# EAGLE board Main Board (EAGLE 7.7.0)

Size 242.55 x 100 mm. Coordinates in mm from the lower left corner, seen from the top.
Outline: 82.55,0 242.55,0 242.55,100 82.55,100 82.55,0
Copper layers (1*16): Top 0.035mm / dielectric 1.5mm / Bottom 0.035mm
Design rules "default": minimum track width 10mil, minimum drill 24mil, track to track 8mil, track to pad 8mil, pad to pad 8mil, via to via 8mil, smd to smd 8mil, copper to edge 40mil, drill to drill 8mil, minimum pad ring 10mil, minimum via ring 8mil, stop-mask expansion 4mil, vias tented up to drill 0mil, thermal gap 10mil

## Footprints (pad centres in the part's own frame; a part is rotated, then mirrored left to right if it is on the bottom)
DIL16 = drill 0.813 long: 1 -8.89,-3.81; 2 -6.35,-3.81; 3 -3.81,-3.81; 4 -1.27,-3.81; 5 1.27,-3.81; 6 3.81,-3.81; 7 6.35,-3.81; 8 8.89,-3.81; 9 8.89,3.81; 10 6.35,3.81; 11 3.81,3.81; 12 1.27,3.81; 13 -1.27,3.81; 14 -3.81,3.81; 15 -6.35,3.81; 16 -8.89,3.81
WIRELESS-NRF24L01-PA-EXT = drill 1 square: 1 -18.415,3.81 | drill 1: 2 -15.875,3.81; 3 -18.415,1.27; 4 -15.875,1.27; 5 -18.415,-1.27; 6 -15.875,-1.27; 7 -18.415,-3.81; 8 -15.875,-3.81
AK500/2-H = drill 1 pad 3: 1 -2.515,0; 2 2.515,0
ARDUINO_UNO = drill 1.016 pad 1.88: 0 63.5,50.8; 1 60.96,50.8; 2 58.42,50.8; 3 55.88,50.8; 3.3V 35.56,2.54; 4 53.34,50.8; 5 50.8,50.8; 5V 38.1,2.54; 6 48.26,50.8; 7 45.72,50.8; 8 41.656,50.8; 9 39.116,50.8; 10 36.576,50.8; 11 34.036,50.8; 12 31.496,50.8; 13 28.956,50.8; A0 50.8,2.54; A1 53.34,2.54; A2 55.88,2.54; A3 58.42,2.54; A4 60.96,2.54; A5 63.5,2.54; AREF 23.876,50.8; GND 26.416,50.8; GND. 43.18,2.54; GND.. 40.64,2.54; I/OREF 30.48,2.54; N/C 27.94,2.54; RESET 33.02,2.54; SCL 18.796,50.8; SDA 21.336,50.8; VIN 45.72,2.54 | drill 1.016 pad 1.88 octagon: +5V 66.167,30.48; GND_ 66.167,25.4; MISO 63.627,30.48; MOSI 66.167,27.94; RESET. 63.627,25.4; SCK 63.627,27.94 | smd 1.016 x 0.508: <PWR>+V 3.861,8.814; <PWR>-V 3.861,6.274 | smd 1.27 x 0.635: <USB>+V 7.772,39.878; <USB>D+ 7.772,38.887; <USB>D- 7.772,37.871; <USB>GND 7.772,36.83 | hole 3.2: 66.04,7.62; 66.04,35.56; 15.24,50.8; 13.97,2.54
DC-DC-STEP-DOWN-LM2596 = drill 1.5 pad 2.5 square: IN+ -19.812,8.636; IN- -19.812,-8.636; OUT+ 19.812,8.636; OUT- 19.812,-8.636 | hole 3: -14.478,7.62; 15.24,-7.62
AK300/2 = drill 1 pad 3: 1 -2.515,0; 2 2.489,0

## Placement (x,y rotation side)
IC1  L293D  [DIL16]  41.91,109.22 0 top  (outside the outline)
M1  WIRELESS-NRF24L01-PA-EXT  [WIRELESS-NRF24L01-PA-EXT]  40.64,92.71 0 top
MOTOR_KANAN  [AK500/2-H]  -6.35,90.17 0 top  (outside the outline)
MOTOR_KIRI  [AK500/2-H]  58.42,111.76 0 top  (outside the outline)
PCB1  ARDUINO_UNO  [ARDUINO_UNO]  0,1.27 0 top
U$1  DC-DC-STEP-DOWN-LM2596  [DC-DC-STEP-DOWN-LM2596]  46.99,68.58 0 top
X1  [AK300/2]  13.97,88.9 0 top

## Library data of the parts
IC1 = st-microelectronics; MPN: L293D; OC_FARNELL: 9589619; OC_NEWARK: 56P8249
M1 U$1 = diy-modules
MOTOR_KANAN MOTOR_KIRI X1 = con-ptr500; OC_FARNELL: unknown; OC_NEWARK: unknown
PCB1 = arduino

## Nets
5V: M1.2 PCB1.5V
6V: PCB1.<USB>+V PCB1.VIN U$1.OUT+
CE: M1.3
CSN: M1.4
GND: M1.1 PCB1.GND.. U$1.OUT-
GND1: IC1.4
GND2: IC1.5
GND3: IC1.13
GND4: IC1.12
MISO: M1.7
MOSI: M1.6
N$1: U$1.IN+ X1.1
N$2: U$1.IN- X1.2
N$12: M1.8
SCK: M1.5
VCC1: IC1.16
VCC2: IC1.8

## Tracks (layer width: path | path; a pad name or v marks a point on that pad's centre or on a via)
5V  (1 unrouted)
6V  (2 unrouted)
GND  (2 unrouted)
N$1  (1 unrouted)
N$2  (1 unrouted)